# Altium PCB PCB1.PcbDoc
Units mil, origin at the board's own origin, x right, y up, seen from the top; angles counter-clockwise.
Board outline 3900 x 3900 mil, 2 copper layers (Top Layer, Bottom Layer), stack 61.756 mil thick; 49 components, 44 nets, 197 pads, 39 vias.
Unrouted connection lines stored in the file: 1.
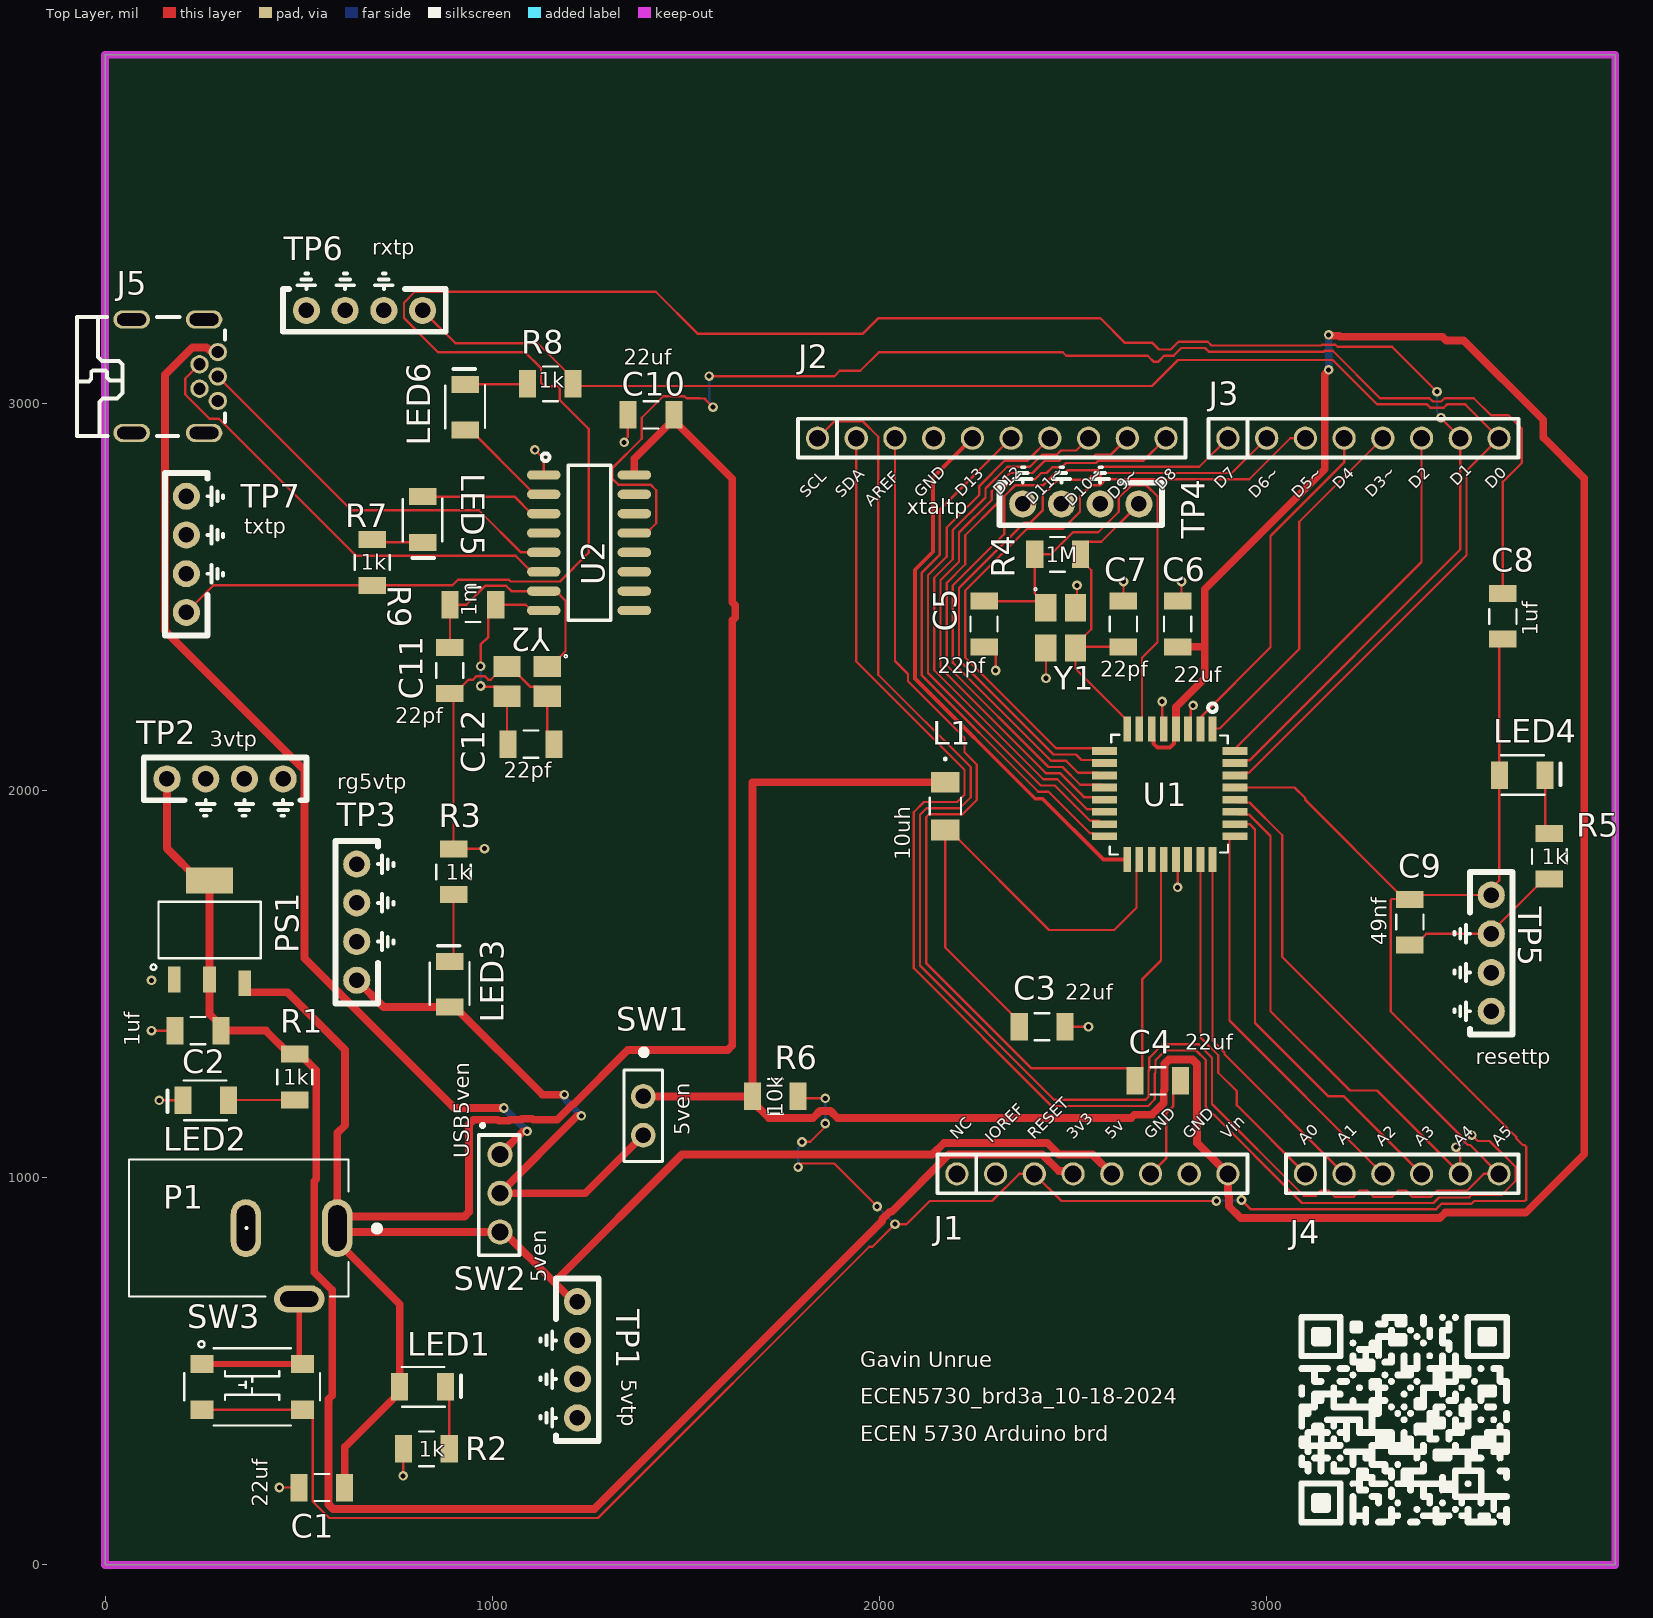
[diagram p0: Top Layer view]
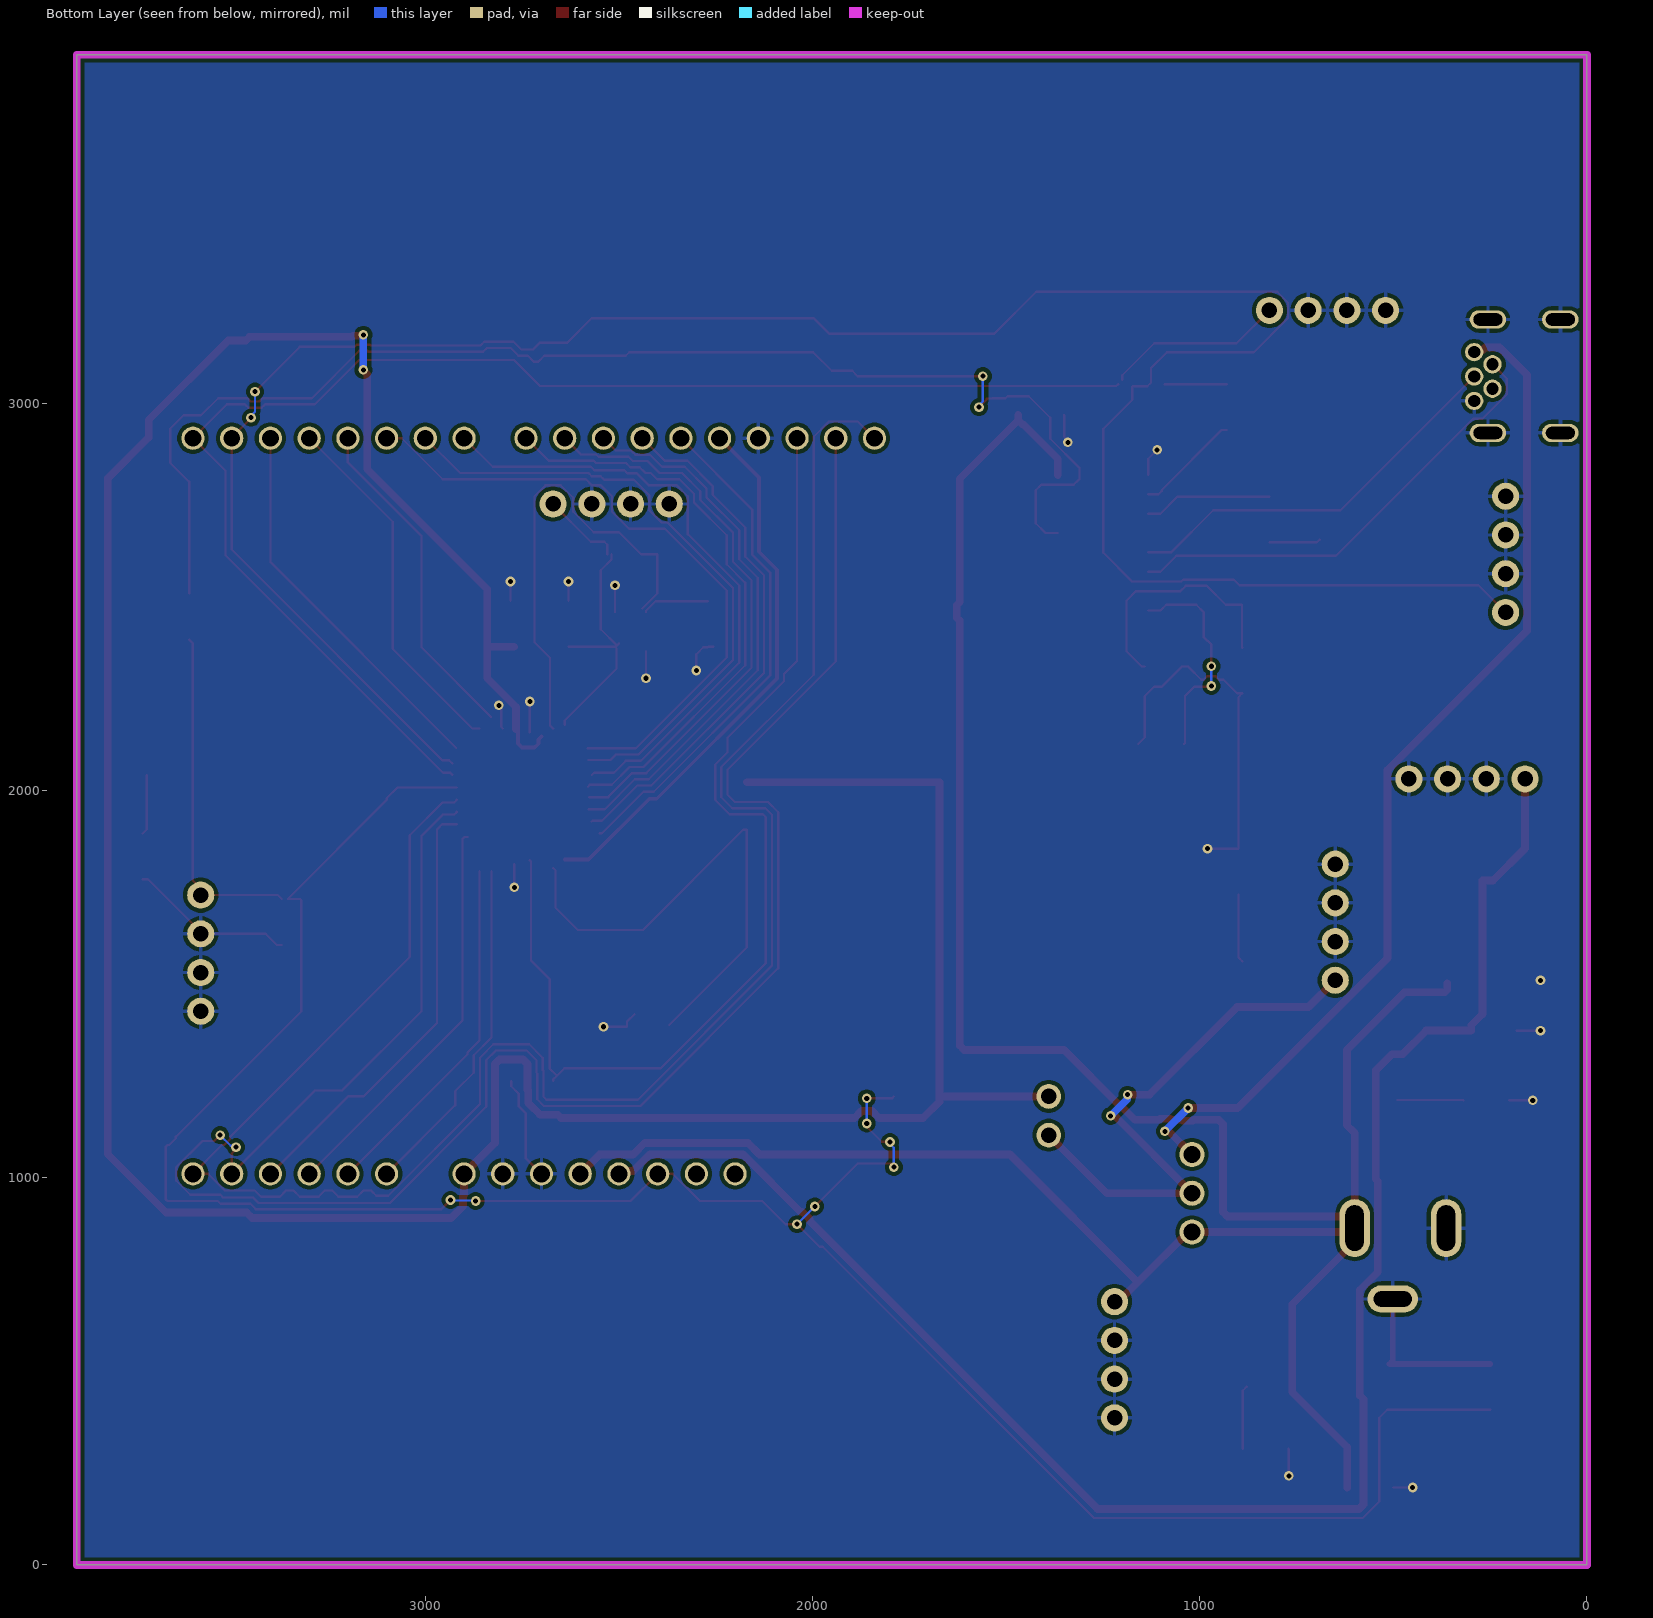
[diagram p1: Bottom Layer view, seen from below]
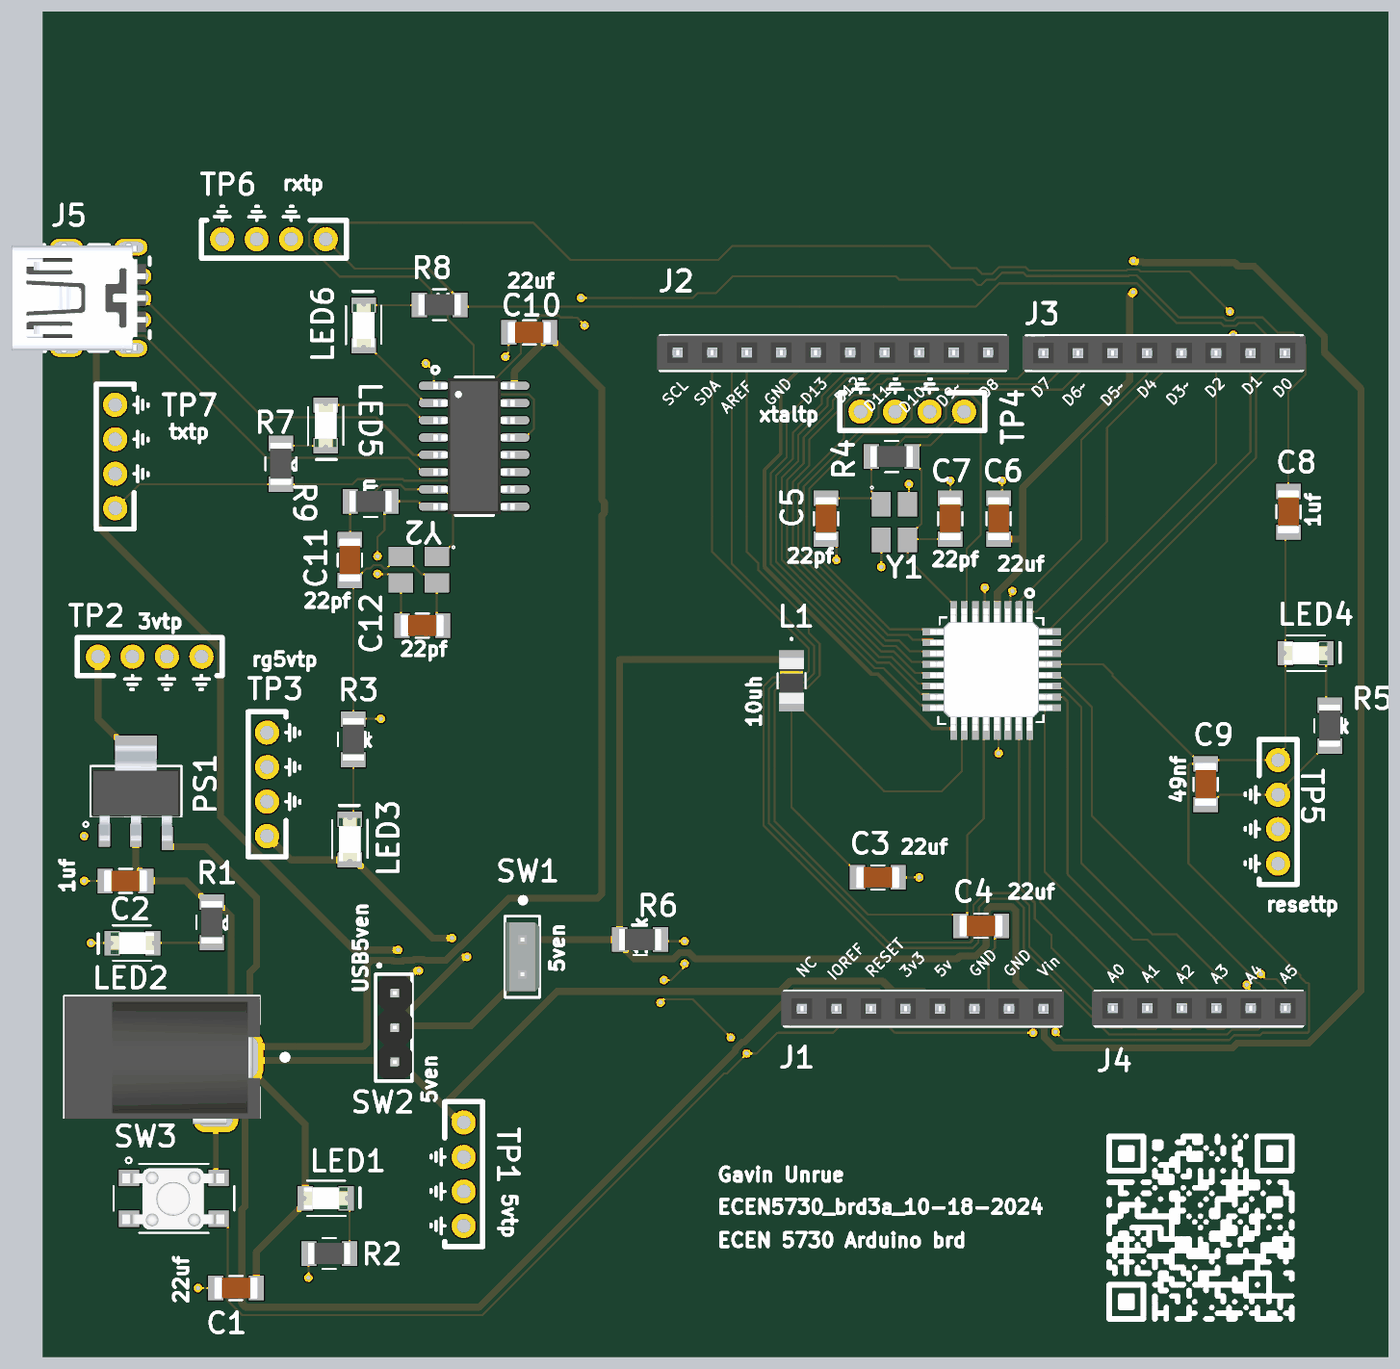
[diagram p2: 3D render of the assembled board from above, using the file's embedded part models]

## Layer stack, top to bottom
Top Solder: solder mask 1, SM-001, Dk 4
Top Layer: signal copper 1.378
Dielectric 1: core 59, Core-043, Dk 4.3
Bottom Layer: signal copper 1.378
Bottom Solder: solder mask 1, SM-001, Dk 4

## Board outline
0,0 3900,0 3900,3900 0,3900 0,1250

## Design rules (kind name [scope] priority, off if disabled: settings)
BoardOutlineClearance [All] p1: gap=10 ignorepadtopadclearanceinfootprint=FALSE except(0: Arc-SplitContinuation Track-SplitContinuation SMDPad-SplitContinuation THPad-SplitContinuation Via-SplitContinuation Fill-SplitContinuation Poly-SplitContinuation Region-SplitContinuation Text-SplitContinuation)
Clearance [All] p1: gap=10 ignorepadtopadclearanceinfootprint=FALSE
PlaneClearance [All] p1: clearance=10
PlaneConnect [All] p1: planeconnectstyle=Direct reliefexpansion=20 reliefentries=4 reliefconductorwidth=10 reliefairgap=10
PolygonConnect [All] p1: thpad.connectstyle=Relief thpad.reliefconductorwidth=10 thpad.reliefentries=4 thpad.polygonreliefangle="90 Angle" thpad.airgapwidth=10 smdpad.connectstyle=Direct smdpad.reliefconductorwidth=10 smdpad.reliefentries=4 smdpad.polygonreliefangle="90 Angle" smdpad.airgapwidth=10 via.connectstyle=Direct via.reliefconductorwidth=10 via.reliefentries=4 via.polygonreliefangle="90 Angle" via.airgapwidth=10
RoutingVias [All] p1: holewidth=13 width=25 viastyle="Through Hole" minholewidth=13 minwidth=25 maxholewidth=60 maxwidth=80
SolderMaskExpansion [All] p1: expansion=4 istentingtop=FALSE
UnRoutedNet [All] p1: checkbadconnections=TRUE
Width "Schematic Width Constraint" [InNet('+5')] p1: maxlimit=100 minlimit=10 preferedwidth=20 minimp=50.000000 maximp=50.000000 favimp=50.000000
Width [All] p2: maxlimit=100 minlimit=6 preferedwidth=6 minimp=50.000000 maximp=50.000000 favimp=50.000000
27 further rules are at their usual default settings.

## Components (designator, comment, footprint, x,y, rotation, side; value= is the part's Value field where it differs from the comment)
C1 "22uF" 1206_Passive_Capacitor 560,200 r0 top
C2 "1uF" 1206_Passive_Capacitor 240,1380 r0 top
C3 "22uF" 1206_Passive_Capacitor 2420,1390 r0 top
C4 "22uF" 1206_Passive_Capacitor 2719,1250 r0 top
C5 "22pF" 1206_Passive_Capacitor 2270,2430 r90 top
C6 "22uF" 1206_Passive_Capacitor 2770,2430 r270 top
C7 "22pF" 1206_Passive_Capacitor 2630,2430 r270 top
C8 "1uF" 1206_Passive_Capacitor 3610,2450 r270 top
C9 "47nF" 1206_Passive_Capacitor 3370,1660 r90 top
C10 "22uF" 1206_Passive_Capacitor 1410,2970 r180 top
C11 "22pF" 1206_Passive_Capacitor 890,2310 r90 top
C12 "22pF" 1206_Passive_Capacitor 1100,2120 r180 top
J1 "PPTC081LFBN-RC" 8_PIN_ARD-PWR_100MIL 2200,1010 r0 top value=Female
J2 "PPTC101LFBN-RC" 10_PIN_ARDUINO_100MIL 1840,2910 r0 top value=Female
J3 "PPTC081LFBN-RC" 8_PIN_ARD-DIG_100MIL 2900,2910 r0 top value=Female
J4 "PPTC061LFBN-RC" 6_PIN_ARD-Analog_100mil 3100,1010 r0 top value=Female
J5 "USB Mini" USB_MINI_B 180,3070 r270 top value="USB mini B"
L1 "FB_10uH_1206" AIML-1206_ABR-M 2170,1960 r270 top
LED1 "Red" LED_1206 820,460 r0 top
LED2 "Red" LED_1206 260,1200 r180 top
LED3 "Red" LED_1206 890,1500 r90 top
LED4 "Red" LED_1206 3660,2040 r0 top
LED5 "Red" LED_1206 820,2700 r270 top
LED6 "Red" LED_1206 930,2990 r90 top
P1 "Power Jack" Power_Jack 600,870 r180 top value="CONN PWR JACK 2X5.5MM SOLDER"
PS1 "AMS1117-3.3" LDO 270,1640 r0 top value="IC REG LINEAR 3.3V 800MA SOT223"
R1 "1k" 1206_Passive_Resitor 490,1260 r90 top value="1K Ohm"
R2 "1k" 1206_Passive_Resitor 830,300 r0 top value="1K Ohm"
R3 "1k" 1206_Passive_Resitor 900,1790 r270 top value="1K Ohm"
R4 "1M" 1206_Passive_Resitor 2460,2610 r180 top value="1M Ohm"
R5 "1k" 1206_Passive_Resitor 3730,1830 r90 top value="1K Ohm"
R6 "10k" 1206_Passive_Resitor 1731,1210 r0 top value=10KOhm
R7 "1k" 1206_Passive_Resitor 690,2589 r90 top value="1K Ohm"
R8 "1k" 1206_Passive_Resitor 1150,3050 r180 top value="1K Ohm"
R9 "1M" 1206_Passive_Resitor 950,2480 r180 top value="1M Ohm"
SW1 "led_on_off_sw" 2Pin-Header-Conn 1390,1210 r270 top
SW2 "PREC003SAAN-RC" 3_PIN_100mil 1020,1060 r270 top value="CONN HEADER VERT 3POS 2.54MM"
SW3 "TL3305AF160QG" Switch_JLC 380,460 r0 top
TP1 "5v TP" TP10x_Probe 1220,530 r270 top
TP2 "3.3v tp" TP10x_Probe 310,2030 r0 top
TP3 "rg5vtp" TP10x_Probe 650,1660 r90 top
TP4 "atmegaXTALtp" TP10x_Probe 2520,2740 r180 top
TP5 "resettp" TP10x_Probe 3580,1580 r270 top
TP6 "rxtp" TP10x_Probe 670,3240 r180 top
TP7 "txtp" TP10x_Probe 210,2610 r90 top
U1 "ATMEGA328P-ANR" ATMega328P 2750,1990 r90 top value="IC MCU 8BIT 32KB FLASH 32TQFP"
U2 "CH340G" "USB to serial" 1250,2640 r270 top value="USB to Serial"
Y1 "X322516MLB4SI" "Crystal resonator" 2470,2420 r270 top value=16MHz
Y2 "X322512MSB4SI" "Crystal resonator" 1090,2280 r180 top value=12MHz

## Footprints (in the part's own frame and the unit in brackets; to place one, negate y for a bottom-side part, rotate by r counter-clockwise, add the part's x,y. Pads: shape width x height; smd on the part's side, far side on the other; paste and mask are expansions set on the pad)
2Pin-Header-Conn [mm]
  round 1.62 hole 1.02: 1(0,0) 2(2.54,0)
  silkscreen extent -3.03,-1.27 4.26,1.26, body extent -1.27,-1.27 3.81,1.27, height 8.13
3_PIN_100mil [mm]
  round 1.65 hole 1.1: 1(0,0) 2(2.54,0) 3(5.08,0)
  silkscreen extent -2,-1.4 6.6,1.27, body extent -1.14,-1.27 6.48,1.27, height 8.38
6_PIN_ARD-Analog_100mil [mil]
  round 60 hole 43.31: 1(0,0) 2(100,0) 3(200,0) 4(300,0) 5(400,0) 6(500,0)
  silkscreen extent -50,-50 550,50, body extent -59,-49 561,51, height 335
8_PIN_ARD-DIG_100MIL [mil]
  round 60 hole 43.31: 1(0,0) 2(100,0) 3(200,0) 4(300,0) 5(400,0) 6(500,0) 7(600,0) 8(700,0)
  silkscreen extent -50,-50 750,50, body extent -60,-50 760,50, height 335
8_PIN_ARD-PWR_100MIL [mil]
  round 60 hole 43.31: 1(0,0) 2(100,0) 3(200,0) 4(300,0) 5(400,0) 6(500,0) 7(600,0) 8(700,0)
  silkscreen extent -50,-50 750,50, body extent -60,-50 760,50, height 335
10_PIN_ARDUINO_100MIL [mil]
  round 60 hole 43.31: 1(0,0) 2(100,0) 3(200,0) 4(300,0) 5(400,0) 6(500,0) 7(600,0) 8(700,0) 9(800,0) 10(900,0)
  silkscreen extent -50,-50 950,50, body extent -60,-49 960,51, height 335
1206_Passive_Capacitor [mil]
  rect 44x71 smd: 1(-59,0) 2(59,0)
  silkscreen extent -19,-35 19,35, body extent -63,-31 63,32, height 50
1206_Passive_Resitor [mil]
  rect 44x71 smd: 1(-59,0) 2(59,0)
  silkscreen extent -19,-45 19,45, body extent -61,-31 61,31, height 26
AIML-1206_ABR-M [mil]
  rect 54x73 smd paste+0 mask+0: 1(-61.5,0) 2(61.5,0)
  silkscreen extent -124,-41 22,41, body extent -66,-36 66,36, height 55
ATMega328P [mm]
  rect 1.65x0.508 smd mask+0.025: 1(4.28,-2.794) 2(4.28,-2.007) 3(4.28,-1.194) 4(4.28,-0.406) 5(4.28,0.406) 6(4.28,1.194) 7(4.28,2.007) 8(4.28,2.794) 17(-4.28,2.794) 18(-4.28,2.007) 19(-4.28,1.194) 20(-4.28,0.406) 21(-4.28,-0.406) 22(-4.28,-1.194) 23(-4.28,-2.007) 24(-4.28,-2.794)
  rect 0.508x1.65 smd mask+0.025: 9(2.843,4.28) 10(2.056,4.28) 11(1.243,4.28) 12(0.455,4.28) 13(-0.357,4.28) 14(-1.145,4.28) 15(-1.958,4.28) 16(-2.745,4.28) 25(-2.745,-4.28) 26(-1.958,-4.28) 27(-1.145,-4.28) 28(-0.357,-4.28) 29(0.455,-4.28) 30(1.243,-4.28) 31(2.056,-4.28) 32(2.843,-4.28)
  silkscreen extent -3.94,-3.81 5.97,3.94, body extent -4.45,-4.47 4.55,4.53, height 1.16
"Crystal resonator" [mm]
  rect 1.8x1.4 smd: 1(-1.32,-1.02) 2(1.32,-1.02) 3(1.32,0.92) 4(-1.32,0.92)
  silkscreen extent -2.63,-1.79 -2.45,-1.61, body extent -1.65,-1.2 1.65,1.2, height 0.8
LDO [mm]
  rect 0.838x1.7 smd: 1(-2.311,-3.25) 2(0,-3.25) 3(2.311,-3.5)
  rect 3.099x1.7 smd: 4(0,3.25)
  silkscreen extent -3.86,-2.62 3.35,1.85, body extent -3.25,-3.65 3.25,3.35, height 1.85
LED_1206 [mil]
  rect 44x71 smd: 1(-59,0) 2(59,0)
  silkscreen extent -54,-51 99,51, body extent -63,-31 63,31, height 28
Power_Jack [mm]
  oval 2x3.8 hole 1.2 slot 3 at 90 deg: 1(0,0) 2(6,0)
  oval 3.3x1.8 hole 1 slot 2.5 at 0 deg: 3(2.5,4.65)
  silkscreen extent -2.79,-4.5 13.68,4.5, body extent -0.76,-4.45 13.64,4.95, height 11.49
Switch_JLC [mm]
  rect 1.5x1.2 smd: 1(-3.3,1.5) 2(3.3,1.5) 3(-3.3,-1.5) 4(3.3,-1.5)
  silkscreen extent -4.44,-2.54 4.45,3, body extent -3.8,-2.29 3.7,2.21, height 3.7
TP10x_Probe [mil] "Small Probs footprint"
  round 70 hole 40: 1(-150,0) 2(-50,0) 2(50,0) 2(150,0)
  silkscreen extent -210,-95 210,55
"USB to serial" [mil]
  oval 24x86.61 smd: 1(-175,-117) 2(-125,-117) 3(-75,-117) 4(-25,-117) 5(25,-117) 6(75,-117) 7(125,-117) 8(175,-117) 9(175,117) 10(125,117) 11(75,117) 12(25,117) 13(-25,117) 14(-75,117) 15(-125,117) 16(-175,117)
  silkscreen extent -231,-122 201,56, body extent -197,-118 197,118, height 71
USB_MINI_B [mm]
  round 1.2 hole 0.8: 1(-1.58,2.826) 2(-0.78,1.622) 3(0.02,2.826) 4(0.82,1.622) 5(1.62,2.826)
  oval 1.2x2.4 hole 0.8 slot 1.9 at 90 deg: 6(-3.72,1.924) 7(3.72,1.924) 8(-3.72,-2.826) 9(3.72,-2.826)
  silkscreen extent -3.89,-6.42 3.93,3.3, body extent -4.04,-6.83 4.06,3.02, height 3.98

## Part data
C1 C3 C4 C6 C10: library part C_22uF_1206, "22uF ±10% 25V X5R 1206 Multilayer Ceramic Capacitors MLCC - SMD/SMT RoHS", LCSC Part#=C12891, MFR Part #=CL31A226KAHNNNE, Datasheet=https://datasheet.lcsc.com/lcsc/1811031514_Samsung-Electro-Mechanics-CL31A226KAHNNNE_C12891.pdf, Type=basic
C2 C8: library part C_1uF_1206, "MULTILAYER CERAMIC CAPACITORS MLCC - SMD/SMT 1UF 50V 1206 ROHS", LCSC Part#=C1848, MFR Part #=CL31B105KBHNNNE, Digikey Link=https://www.digikey.com/product-detail/en/C1206C105M4RACTU/399-8150-1-ND/3471873/?itemSeq=304982366, Type=Basic
C5 C7 C11 C12: library part C_22pF_1206, "22pF ±5% 1kV C0G 1206 Multilayer Ceramic Capacitors MLCC - SMD/SMT RoHS", LCSC Part#=C107174, MFR Part #=CC1206JKNPOCBN220, Datasheet=https://datasheet.lcsc.com/lcsc/1810241219_YAGEO-CC1206JKNPOCBN220_C107174.pdf, Type=Extended
C9: library part C_47nF_1206, "47nF ±5% 50V C0G 1206 Multilayer Ceramic Capacitors MLCC - SMD/SMT RoHS", LCSC Part#=C21812, MFR Part #=GRM31M5C1H473JA01L, Datasheet=https://datasheet.lcsc.com/lcsc/1810201313_Murata-Electronics-GRM31M5C1H473JA01L_C21812.pdf, Type=Extended
J1: library part JF_8_PIN_FEMA_ARD-Pwr, "8 Position Header Connector 0.100\" (2.54mm) Through Hole Tin", LCSC Part#=C27438, Digikey Link=https://www.digikey.com/product-detail/en/PPTC081LFBN-RC/S7006-ND/810147/?itemSeq=304982354, MFR Part #=PPTC081LFBN-RC, Type=Extended
J2: library part JF_10_PIN_FEMA_ARDUINO, "10 Position Header Connector 0.100\" (2.54mm) Through Hole Tin", LCSC Part#=C225507, Digikey Link=https://www.digikey.com/product-detail/en/PPTC101LFBN-RC/S7008-ND/810149/?itemSeq=304982352, MFR Part #=PPTC101LFBN-RC, Type=Extended
J3: library part JF_8_PIN_FEMA_ARD-Dig, "8 Position Header Connector 0.100\" (2.54mm) Through Hole Tin", LCSC Part#=C27438, Digikey Link=https://www.digikey.com/product-detail/en/PPTC081LFBN-RC/S7006-ND/810147/?itemSeq=304982354, MFR Part #=PPTC081LFBN-RC, Type=Extended
J4: library part JF_6_PIN_FEMA_ARD-Anolog, "6 Position Header Connector 0.100\" (2.54mm) Through Hole Tin", LCSC Part#=C40877, Digikey Link=https://www.digikey.com/product-detail/en/PPTC061LFBN-RC/S7004-ND/810145/?itemSeq=304982353, MFR Part #=PPTC061LFBN-RC, Type=Extended
J5: library part J_USB_B_Mini, "Through Hole USB Connectors RoHS", LCSC Part#=C46398, MFR Part #=920-462A2021D10102, Datasheet=https://datasheet.lcsc.com/szlcsc/2103081233_Jing-Extension-of-the-Electronic-Co-920-462A2021D10102_C46398.pdf, Type=Extended
L1: "25mA 10uH ±10% 800mΩ 1206  Inductors (SMD) ROHS", LCSC Part#=C1051, MFR Part #=CMI321609X100KT, Mfr_Name="FH (Guangdong Fenghua Advanced Tech)", Datasheet=https://datasheet.lcsc.com/lcsc/1810311314_FH--Guangdong-Fenghua-Advanced-Tech-CMI321609X100KT_C1051.pdf, Type=Basic
LED1 LED2 LED3 LED4 LED5 LED6: library part LED_RED_1206, "Red 621~631nm 1206 Light Emitting Diodes (LED) RoHS", LCSC Part#=C93133, MFR Part #=15-21/R6C-FQ1R1B/2T, Datasheet=https://datasheet.lcsc.com/szlcsc/1811151241_Everlight-Elec-15-21-R6C-FQ1R1B-2T_C93133.pdf, Type=Extended
P1: library part "P_Power Jack", "Power Barrel Connector Jack 2.10mm ID (0.083\"), 5.50mm OD (0.217\") Through Hole, Right Angle", LCSC Part#=C136744, MFR Part #=PJ-102A, Digikey Link=https://www.digikey.com/product-detail/en/PJ-102A/CP-102A-ND/275425/?itemSeq=304982367, Type=Extended
PS1: library part PS_AMS_LDO_3v3, "LOW DROPOUT REGULATORS(LDO) POSITIVE FIXED 1.3V @ 800MA 15V 3.3V 1A SOT-223 ROHS", LCSC Part#=C6186, MFR Part #=AMS1117-3.3, Type=Basic
R1 R2 R3 R5 R7 R8: library part R_1K_1206, "CHIP RESISTOR - SURFACE MOUNT 1KOHMS ±1% 1/4W 1206 ROHS", LCSC Part#=C4410, MFR Part #=RNCP1206FTD1K00CT, Digikey Link=https://www.digikey.com/product-detail/en/RNCP1206FTD1K00/RNCP1206FTD1K00CT-ND/2240675/?itemSeq=304982373, Type=Basic
R4 R9: library part R_1M_1206, "CHIP RESISTOR - SURFACE MOUNT 1MOHMS ±1% 1/4W 1206 ROHS", LCSC Part#=C17927, MFR Part #=RMCF1206JT1M00, Digikey Link=https://www.digikey.com/product-detail/en/RMCF1206JT1M00/RMCF1206JT1M00CT-ND/1942830/?itemSeq=304982358, Type=Basic
R6: library part R_10KOhm_1206, "10 kOhms ±5% 0.25W, 1/4W Chip Resistor 1206 (3216 Metric) Automotive AEC-Q200 Thick Film", LCSC Part#=C17902, MFR Part #=RMCF1206FT10K0, Digikey Link=https://www.digikey.com/en/products/detail/stackpole-electronics-inc/RMCF1206FT10K0/1759669, Type=Basic
SW1: library part SW_2Pin_100mil_Switch, "2Pin Header", LCSC Part#=C124375, Type=Extended
SW2: library part SW_3Pin_100mil_Switch, "Connector Header Through Hole 3 position 0.100\" (2.54mm)", LCSC Part#=C49257, Digikey Link=https://www.digikey.com/product-detail/en/PREC003SAAN-RC/S1012EC-03-ND/2774851/?itemSeq=304982371, MFR Part #=PREC003SAAN-RC, Type=Extended
SW3: library part SW_Push_Button_JLC, "Tactile Switch SPST-NO Top Actuated Surface Mount", LCSC Part#=C2837550, MFR Part #=KH-4.5X4.5X4.3H-STM, Datasheet=https://datasheet.lcsc.com/lcsc/2106081532_Shenzhen-Kinghelm-Elec-KH-4.5X4.5X4.3H-STM_C2837550.pdf, Type=Extended
TP1 TP2 TP3 TP4 TP5 TP6 TP7: library part TP_10x_Probe, "Test Point 300 mil centers"
U1: library part U_ATMega328P, "AVR AVR® ATmega Microcontroller IC 8-Bit 20MHz 32KB (16K x 16) FLASH 32-TQFP (7x7)", LCSC Part#=C14877, MFR Part #=ATMEGA328P-AU, Digikey Link=https://www.digikey.com/product-detail/en/ATMEGA328P-ANR/ATMEGA328P-ANRCT-ND/2774230/?itemSeq=304982365, Type=Basic
U2: library part U_USBtoSerial, "Transceiver USB 2.0 2Mbps SOP-16_150mil USB ICs RoHS", LCSC Part#=C14267, Datasheet=https://datasheet.lcsc.com/lcsc/2008191806_WCH-Jiangsu-Qin-Heng-CH340G_C14267.pdf, MFR Part #=CH340G, Type=Basic
Y1: library part X_16Mhz_Res, "±10ppm 16000000Hz -40℃~85℃ 贴片无源晶振 60Ω 9pF SMD3225-4P Crystals ROHS", LCSC Part#=C13738, MFR Part #=X322516MLB4SI, Type=Basic
Y2: library part X_12MHz_Res, "SMD Crystal Resonators 12MHz ±10ppm SMD-3225_4P RoHS", LCSC Part#=C9002, Datasheet=https://datasheet.lcsc.com/szlcsc/Yangxing-Tech-X322512MSB4SI_C9002.pdf, MFR Part #=X322512MSB4SI, Type=Basic

## Via types
v1: diameter 25, hole 13, Top Layer to Bottom Layer, 39 vias

## Nets (pads, with @x,y where several pads share a name; then routed paths per layer and width w, separated by ;. In a path a pad name is that pad's centre, name@x,y a point inside that pad or via, vN(x,y) a via of type N, cw(c..) or ccw(c..) an arc to the next point about the centre after c; other vN are vias at no path point)
3v: C2.2 J1.4 PS1.2 PS1.4 R1.2 TP2.1 | length 4489.5
  Top Layer w20: TP2.1 160,1850.42 242.46,1767.95 PS1.4 PS1.2 270,1422.5 299,1393.5 C2.2 415.5,1380 476.5,1319 R1.2 503.5,1319 545.5,1277 545.5,995.98 540.63,991.11 540.63,755.8 586.54,709.89 586.54,437.82 577,428.29 577,156.22 588.72,144.5 1263.79,144.5 2007.5,888.21 2007.5,893.46 2026.54,912.5 2031.79,912.5 2179.29,1060 2420.71,1060 2463.06,1017.65 2492.35,1017.65 J1.4
+5: C1.2 C10.1 J1.5 LED1.1 P1.1 PS1.3 SW2.3 TP1.1 U2.16 | length 7158.3
  Top Layer w20: PS1.3 361,1485.24 367.5,1478.74 471.26,1478.74 620,1330 620,1135.66 600,1115.66 P1.1@600,872.87 ; C1.2 619,304.5 761,446.5 LED1.1 761,673.57 600,834.57 600,860 P1.1 ; TP1.1 1210,680 1160,730 ; U2.16 1367,2857 1454.5,2944.5 1457,2944.5 C10.1@1469,2956.5 ; C10.1 C10.1@1469,2956.5 ; J1.5 2550,1060 2463.14,1060 2433.14,1090 2166.86,1090 2136.86,1060 1490,1060 1160,730 ; P1.1 P1.1@600,872.87 ; P1.1 610,860 SW2.3 1030,860 1160,730 ; P1.1@600,872.87 627.13,900 928.28,900 940,911.72 940,1138.28 951.72,1150 1014.04,1150 1016.54,1147.5 1043.46,1147.5 1045.96,1150 1074.04,1150 1076.54,1152.5 1103.46,1152.5 1105.96,1150 1167.57,1150 1207.57,1190 1210,1190 1350,1330 1608.28,1330 1620,1341.72 1620,2439.04 1627.5,2446.54 1627.5,2478.46 1620,2485.96 1620,2805.5 C10.1@1469,2956.5
dtr: C8.1 U2.13 | length 3459.2
  Top Layer w6: U2.13 1398.31,2665 1423.31,2690 1423.31,2775.36 1408.66,2790 1325.34,2790 1310.69,2804.64 1310.69,2833.22 1386,2908.53 1386,2962.88 1441.62,3018.5 1496.38,3018.5 1501.88,3013 1535.68,3013 1536.18,3012.5 1550,3012.5 ; 1550,3010 v1(1570,2990) ; v1(1560,3070) 1883.63,3070 1897.63,3084 1950.56,3084 1998.56,3132 2473.25,3132 2482.19,3123.07 2692.74,3123.07 2708.74,3107.07 2719.18,3107.07 2735.18,3123.07 2759.68,3123.07 2779.5,3142.89 2841.06,3142.89 2850.75,3133.19 3147.13,3133.19 3149.44,3135.5 3170.56,3135.5 3292.81,3013.25 3420.69,3013.25 3429.44,3004.5 3450.56,3004.5 3459.31,3013.25 3534.93,3013.25 3579.18,2969 3624.44,2969 3659,2934.44 3659,2846.37 3610,2797.37 C8.1
  Bottom Layer w6: v1(1560,3070) 1560,3005.14 1570,2995.14 v1(1570,2990)
GND: C1.1 C2.1 C3.2 C4.2 C5.1 C6.1 C7.1 C9.1 C10.2 C11.1 C12.1 J1.6 J1.7 J2.4 J5.5 J5.6 J5.7 J5.8 J5.9 LED2.2 P1.2 P1.3 PS1.1 R2.1 R3.1 R5.1 SW3.1 SW3.2 TP1.2 TP2.2 TP3.2 TP4.2 TP5.2 TP6.2 TP7.2 U1.3 U1.5 U1.21 U2.1 Y1.2 Y1.4 Y2.2 Y2.4 | length 3105.4
  Top Layer w6: v1(120,1380) C2.1 ; v1(140,1200) LED2.2 ; v1(450,200) C1.1 ; v1(770,230) 770,299 R2.1 ; v1(980,1850) 901,1850 R3.1 900,2241 C11.1 903.5,2251 938.5,2286 949.94,2286 959.44,2295.5 980.56,2295.5 990.06,2286 996,2286 1030.16,2320.16 Y2.2 1045.91,2320.16 1097.72,2268.34 1117.41,2268.34 Y2.4 1141.97,2137.03 C12.1 ; v1(1110,2880) 1133,2857 U2.1 ; v1(1340.71,2899.29) 1340.71,2904.44 1350,2913.73 1350,2969 C10.2 ; C5.1@2256.5,2371 C5.1 ; C5.1@2270,2370 2282,2370 2300,2352 v1(2300,2310) ; v1(2430,2290) Y1.2@2430,2360 ; C3.2@2460,1422.5 2479,1403.5 C3.2 v1(2540,1390) ; Y1.4@2510,2460 v1(2510,2530) ; C7.1@2630,2490 v1(2630,2540) ; J1.6 2741,1051 2741,1167.43 2759,1185.43 2759,1217.5 2778,1236.5 C4.2 ; U1.5@2730,2150 v1(2730,2230) ; v1(2770,1750) U1.21@2770,1810 ; C6.1@2780,2490 v1(2780,2540) ; U1.3@2800,2160 2804,2164 2804,2208.86 2810,2214.86 v1(2810,2220) ; C9.1 3383.5,1601 3412.5,1630 3580,1630 3580,1634.5 3716.5,1771 R5.1
  Top Layer w15: SW3.1 SW3.2 501.57,527.4 P1.3
  other v1: 120,1510
NetC3_1: C3.1 L1.2 U1.18 | length 1316.7
  Top Layer w6: C3.1@2370,1394.5 2170,1594.5 L1.2 2179.5,1898.5 2438,1640 2606.49,1640 2664,1697.51 2664,1794 U1.18@2670,1800
NetC4_1: C4.1 J2.3 U1.20 | length 2810.9
  Top Layer w6: J2.3 2040,2334.28 2073.5,2300.78 2073.5,2282.31 2219.5,2136.31 2219.5,2099.14 2251.5,2067.14 2251.5,1975.86 2214.14,1938.5 2128.12,1938.5 2120.5,1930.88 2120.5,1554.62 2392.62,1282.5 2641,1282.5 C4.1@2660,1263.5 ; C4.1@2670,1250 2670,1253.5 C4.1@2660,1263.5 ; U1.20@2730,1820 2727,1817 2727,1561.26 2679,1513.26 2679,1282.5 C4.1@2660,1263.5
NetC5_2: C5.2 R4.2 U1.7 Y1.1 | length 1374
  Top Layer w6: C5.2 2405.28,2489 2430,2464.28 Y1.1@2430,2460 ; Y1.1@2440,2470 2439.68,2470 2401,2508.68 R4.2 2443.12,2610 2500.17,2667.06 2564.94,2667.06 2618,2720.12 2618,2755.88 2650.12,2788 2689.88,2788 2718,2759.88 2718,2383.12 2678,2343.12 2678,2168 U1.7@2670,2160
NetC7_2: C7.2 R4.1 TP4.1 U1.8 Y1.3 | length 859.3
  Top Layer w6: Y1.3@2500,2380 Y1.3@2505.16,2374.84 ; Y1.3 2506.22,2314.76 2640,2180.98 U1.8@2640,2170 ; R4.1 2519,2596.5 2546.78,2568.72 2546.78,2416.46 Y1.3@2505.16,2374.84 ; R4.1@2530,2610 2530,2634.5 2538,2642.5 2572.5,2642.5 TP4.1 ; C7.2 2509,2371 Y1.3@2505.16,2374.84
NetC11_2: C11.2 R9.2 U2.7 Y2.1 | length 639.8
  Top Layer w6: C11.2 891,2370 R9.2 933.12,2480 981.62,2528.5 1036.38,2528.5 1049.88,2515 U2.7 1164.31,2515 1189.31,2490 1189.31,2359.62 1149.84,2320.16 Y2.1
NetC12_2: C12.2 R9.1 U2.8 Y2.3 | length 560.3
  Top Layer w6: v1(970,2270) 971.66,2268.34 1013.47,2268.34 Y2.3 1038.03,2122.97 C12.2 ; v1(970,2321) 970,2376.82 990,2396.82 990,2461 R9.1 1086.69,2480 1101.69,2465 U2.8
  Bottom Layer w6: v1(970,2270) v1(970,2321)
NetD1_1: LED6.1 U2.2 | length 273.5
  Top Layer w6: LED6.1 943.5,2931 1098.25,2776.25 1098.25,2773.31 1106.56,2765 U2.2
NetD1_4: LED5.1 U2.3 | length 331.2
  Top Layer w6: LED5.1 1057.69,2759 1101.69,2715 U2.3
NetJ2_1: J2.1 J4.6 U1.28 | length 5081
  Top Layer w6: J2.1 1883,2953 1957.81,2953 1997,2913.81 1997,2299.01 2235.5,2060.51 2235.5,1982.49 2207.51,1954.5 2121.49,1954.5 2104.5,1937.51 2104.5,1547.99 2450.99,1201.5 2687.38,1201.5 2695,1209.12 2695,1275.87 2697,1277.87 2697,1309.94 2731.56,1344.5 2824.44,1344.5 2859,1309.94 2859,1190.19 3095.7,953.49 3126.92,953.49 3140.44,967 3159.56,967 3175.56,951 3224.44,951 3240.44,967 3259.56,967 3275.56,951 3324.44,951 3340.44,967 3359.56,967 3375.56,951 3424.44,951 3440.44,967 3517.81,967 3560.81,1010 J4.6 3525.5,1084.5 3519.44,1084.5 3504.5,1099.44 3504.5,1105.5 3040,1570 3040,1884.3 2955.37,1968.93 2925.5,1968.93 U1.28
NetJ2_2: J2.2 J4.5 U1.27 | length 5215.8
  Top Layer w6: J2.2 1940,2333.38 2219.5,2053.88 2219.5,1989.12 2200.88,1970.5 2114.86,1970.5 2088.5,1944.14 2088.5,1541.36 2444.36,1185.5 2694.01,1185.5 2711,1202.49 2711,1269.25 2713,1271.25 2713,1303.31 2738.19,1328.5 2817.81,1328.5 2843,1303.31 2843,1183.56 3091.56,935 3431.07,935 3445.07,949 3522.44,949 3529.44,956 3606.81,956 3643,992.19 3643,1027.81 3575.75,1095.06 3544.94,1095.06 v1(3530,1110) ; U1.27 2925.5,1937.93 2954.37,1937.93 3010,1882.3 3010,1430 3214.83,1225.17 3284.83,1225.17 J4.5@3495,1015 ; v1(3488.94,1078.94) 3488.94,1073.8 3500,1062.73 J4.5 J4.5@3490,1000
  Bottom Layer w6: v1(3488.94,1078.94) 3492.57,1082.57 3502.57,1082.57 v1(3530,1110)
NetJ2_5: J2.5 U1.17 | length 1420.1
  Top Layer w10: J2.5@2240,2900 2230,2900 2138,2808 2138,2616.73 2091.5,2570.23 2091.5,2289.77 2402.34,1978.93 2420.8,1978.93 2578.24,1821.5 U1.17
NetJ2_6: J2.6 U1.16 | length 1317.5
  Top Layer w6: J2.6 2156,2726 2156,2609.28 2109.5,2562.78 2109.5,2297.22 2409.79,1996.93 2436.63,1996.93 2543.63,1889.93 U1.16@2550,1889.93
NetJ2_7: J2.7 U1.15 | length 1374.1
  Top Layer w6: J2.7 2382,2852 2323.61,2852 2258,2786.39 2258,2763.76 2173.5,2679.26 2173.5,2604.15 2125.5,2556.15 2125.5,2303.85 2416.42,2012.93 2452.63,2012.93 2543.63,1921.93 2568.07,1921.93 U1.15@2570,1920
NetJ2_8: J2.8 U1.14 | length 1429.2
  Top Layer w6: J2.8 2508,2878 2468.81,2878 2464.96,2874.15 2457.81,2867 2422.19,2867 2419.63,2867 2388.63,2836 2330.24,2836 2274,2779.76 2274,2757.14 2189.5,2672.64 2189.5,2597.52 2141.5,2549.52 2141.5,2310.48 2423.05,2028.93 2459.26,2028.93 2536.26,1951.93 U1.14@2578.07,1951.93
NetJ2_9: J2.9 U1.13 | length 1475.6
  Top Layer w6: U1.13@2577.07,1982.93 2527.89,1982.93 2465.89,2044.93 2429.68,2044.93 2157.5,2317.11 2157.5,2542.89 2205.5,2590.89 2205.5,2666.01 2290,2750.51 2290,2773.14 2336.86,2820 2395.25,2820 2426.25,2851 2464.44,2851 2471.59,2858.15 2475.44,2862 2552.81,2862 2558.81,2868 2598,2868 J2.9
NetJ2_10: J2.10 U1.12 | length 1527.5
  Top Layer w6: U1.12@2580,2010 2575.07,2014.93 2518.51,2014.93 2472.51,2060.93 2436.3,2060.93 2173.5,2323.73 2173.5,2536.27 2221.5,2584.27 2221.5,2659.38 2306,2743.88 2306,2766.51 2343.49,2804 2401.88,2804 2417.88,2820 2431.49,2820 2446.49,2835 2471.07,2835 2472.07,2836 2482.07,2846 2559.44,2846 2565.44,2852 2682,2852 J2.10
NetJ3_1: J3.1 U1.11 | length 1625.4
  Top Layer w6: U1.11@2570,2040 2564.07,2045.93 2512.97,2045.93 2481.97,2076.93 2442.93,2076.93 2189.5,2330.36 2189.5,2529.64 2322,2662.14 2322,2759.88 2350.12,2788 2422.12,2788 2453.12,2819 2477.69,2819 2486.19,2827.5 2563.57,2827.5 2572.07,2836 2826,2836 J3.1
NetJ3_2: J3.2 U1.10 | length 1645.2
  Top Layer w6: U1.10@2580,2078.93 2521.78,2078.93 2507.78,2092.93 2449.56,2092.93 2205.5,2336.99 2205.5,2523.01 2374.49,2692 2389.88,2692 2422,2724.12 2422,2763.31 2461.69,2803 2538.49,2803 2546.99,2811.5 2570.19,2811.5 2578.69,2820 2910,2820 J3.2
NetJ3_3: J3.3 U1.9 | length 1694.4
  Top Layer w6: U1.9@2581.07,2108.93 2456.19,2108.93 2221.5,2343.62 2221.5,2516.38 2381.12,2676 2473.88,2676 2518,2720.12 2518,2759.88 2546.12,2788 2569.32,2788 2585.32,2804 2954.81,2804 3060.81,2910 J3.3
NetJ3_4: J3.4 U1.2 | length 873.3
  Top Layer w6: U1.2@2830,2190 3009.83,2369.83 3009.83,2657.31 3200,2847.47 J3.4
NetJ3_5: J3.5 U1.1 | length 943.4
  Top Layer w6: U1.1@2860,2160 2879,2160 3084.33,2365.33 3084.33,2694.33 J3.5
NetJ3_6: J3.6 U1.32 | length 998.8
  Top Layer w6: U1.32@2920,2110 3400,2590 J3.6
NetJ4_1: J4.1 U1.23 | length 893.7
  Top Layer w6: U1.23@2829,1791.5 2829,1362.57 2875,1316.57 2875,1271.31 2923,1223.31 2923,1187 J4.1
NetJ4_2: J4.2 U1.24 | length 922.3
  Top Layer w6: U1.24@2860,1791.5 2860,1354.19 2891,1323.19 2891,1319 J4.2
NetJ4_3: J4.3 U1.25 | length 1045
  Top Layer w6: U1.25@2890,1880 2898.81,1880 2903.88,1874.93 2903.88,1406.12 J4.3
NetJ4_4: J4.4 U1.26 | length 1147.6
  Top Layer w6: U1.26 2956.74,1912.93 2970,1899.67 2970,1870 ; 2970,1869.41 2970,1400 3159.83,1210.17 3199.83,1210.17 J4.4
NetJ5_2: J5.2 U2.6 | length 1208.6
  Top Layer w6: J5.2 207.24,3064.09 207.24,3022.56 269.63,2960.17 294.55,2960.17 648.71,2606 1060.69,2606 1101.69,2565 U2.6
NetJ5_3: J5.3 U2.5 | length 1029.9
  Top Layer w6: J5.3 636.47,2724 965.32,2724 1074.32,2615 U2.5
NetLED1_2: LED1.2 R2.2 | length 164.1
  Top Layer w6: LED1.2 889,450 R2.2
NetLED2_1: LED2.1 R1.1 | length 171.4
  Top Layer w6: LED2.1 320,1201 R1.1
NetLED3_2: LED3.2 R3.2 | length 176.1
  Top Layer w6: LED3.2 900,1569 R3.2
NetLED4_2: LED4.2 R5.2 | length 155.6
  Top Layer w6: LED4.2 3719,1900 R5.2
NetLED5_2: LED5.2 R7.2 | length 132.9
  Top Layer w6: R7.2 697,2641 LED5.2
NetLED6_2: LED6.2 R8.2 | length 161.4
  Top Layer w6: LED6.2 1090,3049 R8.2
reset: C8.2 C9.2 J1.3 LED4.1 R6.2 SW3.3 SW3.4 TP5.1 U1.29 | length 7098.3
  Top Layer w6: SW3.3 SW3.4 515.83,400.94 536.45,380.32 536.45,164.24 579.19,121.5 1273.32,121.5 1973.59,821.78 1981.78,821.78 v1(2040,880) 2070,880 2130,940 2290.81,940 2360.81,1010 J1.3 2470,940 v1(2870,940) ; v1(1790,1027.5) 1790,1037 1883,1037 v1(1994.04,925.96) ; R6.2 1795,1205 v1(1860,1205) ; v1(1800,1092.5) 1800.5,1093 1821.5,1093 1860,1131.5 v1(1860,1140) ; U1.29 3072.07,2007.93 3100,1980 3100,1975.5 3355.5,1720 3323.51,1720 3320,1716.49 3320,1430 3644.5,1105.5 3644.5,1101.56 3661.56,1084.5 3665.5,1084.5 3670,1080 3670,943.51 3666.49,940 3536.07,940 3529.07,933 3451.69,933 3437.69,919 2958.5,919 v1(2935,942.5) ; C9.2@3370,1720 3371,1720 3381,1730 TP5.1 3580,1747.32 3601,1768.32 LED4.1 3601,2381 C8.2@3610,2390
  Bottom Layer w6: v1(1790,1027.5) 1790,1077.36 1800,1087.36 v1(1800,1092.5) ; v1(1860,1140) v1(1860,1205) ; v1(1994.04,925.96) v1(2040,880) ; v1(2870,940) 2871.25,941.25 2933.75,941.25 v1(2935,942.5)
rg5v: LED3.1 SW1.2 SW2.2 TP3.1 | length 1456.1
  Top Layer w20: TP3.1 719,1441 LED3.1 903.5,1441 1130.09,1214.41 v1(1186.12,1214.41) ; v1(1230,1160) 1220,1160 SW2.2 1240,960 SW1.2
  Bottom Layer w20: v1(1186.12,1214.41) 1187.08,1213.46 1187.08,1202.92 v1(1230,1160)
rg5vsw: C6.2 J1.8 L1.1 R6.1 SW1.1 U1.4 U1.6 | length 8269.5
  Top Layer w10: U1.6@2700,2140 2708,2132 2708,2120.81 2717.79,2111.02 2750.21,2111.02 2761,2121.81 2761,2153.5 U1.4
  Top Layer w20: SW1.1 R6.1 ; L1.1 1672,2021.5 R6.1 ; U1.4 2766,2216 2840,2290 2840,2370 ; C6.2 2839,2371 2840,2370 ; v1(3160,3086.5) 3160,3085.15 3150,3075.15 3150,2910 3150,2830 2840,2520 2840,2370 ; v1@3160,3174.5 3186.72,3174.5 3189.03,3172.19 3453.78,3172.19 3463.9,3162.07 3509.15,3162.07 3714,2957.22 3714,2911.97 3820,2805.97 3820,1060.99 3669.01,910 3461.22,910 3447.22,896 2933.04,896 2902.5,926.54 2902.5,953.46 2900,955.96 J1.8 2820,1090 2820,1293.78 2808.28,1305.5 2747.72,1305.5 2736,1293.78 2736,1227.03 2734,1225.03 2734,1192.96 2703.54,1162.5 2658.28,1162.5 2650.28,1154.5 1891.46,1154.5 1873.46,1172.5 1846.54,1172.5 1828.54,1154.5 1714,1154.5 1672,1196.5 R6.1
  Bottom Layer w20: v1(3160,3086.5) v1(3160,3177)
rxled: J3.8 R8.1 TP6.1 U1.30 | length 4131.4
  Top Layer w6: TP6.1 904.87,3155.13 1117.37,3155.13 1200,3072.5 R8.1@1200,3060 ; R8.1@1210,3050 1215.5,3044.5 2703.75,3044.5 2771.25,3112 3170.56,3112 3285.31,2997.25 3414.06,2997.25 3422.81,2988.5 3457.19,2988.5 3465.94,2997.25 3512.75,2997.25 J3.8 3516,2826 3516,2607.56 2954.37,2045.93 2935.93,2045.93 U1.30@2930,2040
txled: J3.7 R7.1 TP7.1 U1.31 | length 6167.7
  Top Layer w6: TP7.1 280,2530 R7.1 897.42,2530 911.92,2544.5 1043.01,2544.5 1047.51,2540 1174.66,2540 1249.14,2614.48 1249.14,2933.98 1174,3009.12 1174,3042.88 1172.88,3044 1135.37,3044 1126,3053.37 1126,3090.88 1085.38,3131.5 860.62,3131.5 772,3220.12 772,3259.88 800.12,3288 1422,3288 1530,3180 1957.37,3180 1997.37,3220 2570,3220 2634,3156 2705.07,3156 2722,3139.07 2752.44,3139.07 2772.26,3158.89 2847.69,3158.89 2857.38,3149.19 3140.5,3149.19 3142.81,3151.5 3177.19,3151.5 3182.69,3146 3324,3146 3431.58,3038.42 v1(3440,3030) ; U1.31@2930,2070 2937.93,2077.93 2955.37,2077.93 3500,2622.56 J3.7 ; v1(3450,2963) 3450,2961.5 3491.5,2920 J3.7@3500,2920
  Bottom Layer w6: v1(3440,3030) 3440,2978.14 3450,2968.14 v1(3450,2963)
usb5v: J5.1 SW2.1 | length 2681.1
  Top Layer w20: J5.1 286.04,3137.42 268.85,3137.42 261.93,3144.34 225.8,3144.34 155,3073.54 155,2412.78 515,2052.78 515,1567.22 902.22,1180 v1(1030,1180) ; SW2.1 1080,1120 v1(1090,1120)
  Bottom Layer w20: v1(1030,1180) v1(1090,1120)
pads on no net: J1.1 J1.2 J5.4 U1.19 U1.22 U2.4 U2.9 U2.10 U2.11 U2.12 U2.14 U2.15

## Polygon pours and split planes (outlines as drawn)
GND on Bottom Layer "NONET_L-01_P-001" (solid, pour order 1): 0,3900 3900,3900 3900,0 0,0

## Keep-outs
Keep-Out Layer:
  the board outline again, w20

## Silkscreen, mask and mechanical layers (free items; w line width, h text height)
Top Overlay:
  drawing of 73 lines, arcs and shapes, not listed
  text "rxtp" at 690,3383.33 h40
  text "22uf" at 1340,3100 h40
  text "1k" at 1120,3040 h40
  text "xtaltp" at 2070,2713.33 h40
  text "txtp" at 360,2663.33 h40
  text "1M" at 2430,2590 h40
  text "1k" at 660,2570 h40
  text "1m" at 960,2450 h40 r90
  text "1uf" at 3700,2400 h40 r90
  text "22pf" at 2150,2303.33 h40
  text "22pf" at 2570,2293.33 h40
  text "22uf" at 2760,2280 h40
  text "22pf" at 750,2173.33 h40
  text "3vtp" at 270,2113.33 h40
  text "22pf" at 1030,2033.33 h40
  text "rg5vtp" at 600,2003.33 h40
  text "10uh" at 2080,1820 h40 r90
  text "1k" at 3710,1810 h40
  text "1k" at 880,1770 h40
  text "49nf" at 3310,1600 h40 r90
  text "22uf" at 2480,1460 h40
  text "1uf" at 90,1340 h40 r90
  text "22uf" at 2790,1330 h40
  text "resettp" at 3540,1293.33 h40
  text "1k" at 460,1240 h40
  text "10k" at 1750,1160 h40 r90
  text "5ven" at 1510,1110 h40 r90
  text "USB5ven" at 940,1050 h40 r90
  text "5ven" at 1140,730 h40 r90
  text "Gavin Unrue" at 1950,510 h40
  text "5vtp" at 1333.33,480 h40 r270
  text "ECEN5730_brd3a_10-18-2024" at 1950,416.66 h40
  text "ECEN 5730 Arduino brd" at 1950,320 h40
  text "1k" at 810,280 h40
  text "22uf" at 420,150 h40 r90

## Text inside footprints (layer, text, board x,y; h text height)
J1: Top Overlay "RESET" at 2400,1097.07 h30 r45; Top Overlay "Vin" at 2900,1097.07 h30 r45; Top Overlay "GND" at 2800,1097.07 h30 r45; Top Overlay "GND" at 2700,1097.07 h30 r45; Top Overlay "5v" at 2600,1097.07 h30 r45; Top Overlay "3v3" at 2500,1097.07 h30 r45; Top Overlay "IOREF" at 2290,1088.39 h30 r45; Top Overlay "NC" at 2200,1097.07 h30 r45
J2: Top Overlay "SCL" at 1811,2753.21 h30 r45; Top Overlay "SDA" at 1903,2753.21 h30 r45; Top Overlay "AREF" at 1979,2732 h30 r45; Top Overlay "GND" at 2106,2753.21 h30 r45; Top Overlay "D13" at 2212,2756.74 h30 r45; Top Overlay "D12" at 2310,2760 h30 r45; Top Overlay "D11~" at 2396,2735.53 h30 r45; Top Overlay "D10~" at 2497,2732 h30 r45; Top Overlay "D9~" at 2606,2749.67 h30 r45; Top Overlay "D8" at 2729,2774.41 h30 r45
J3: Top Overlay "D0" at 3581,2776.81 h30 r45; Top Overlay "D1" at 3491,2785 h30 r45; Top Overlay "D2" at 3384,2777 h30 r45; Top Overlay "D3~" at 3271,2755 h30 r45; Top Overlay "D4" at 3187,2775 h30 r45; Top Overlay "D6~" at 2971,2752.07 h30 r45; Top Overlay "D7" at 2881,2776.81 h30 r45; Top Overlay "D5~" at 3081,2752.07 h30 r45
J4: Top Overlay "A1" at 3198,1082 h30 r45; Top Overlay "A0" at 3098,1082 h30 r45; Top Overlay "A2" at 3298,1079.07 h30 r45; Top Overlay "A3" at 3398,1079.07 h30 r45; Top Overlay "A4" at 3498,1079.07 h30 r45; Top Overlay "A5" at 3598,1079.07 h30 r45